# EAGLE board TinyDuino v1 (EAGLE 6.1)
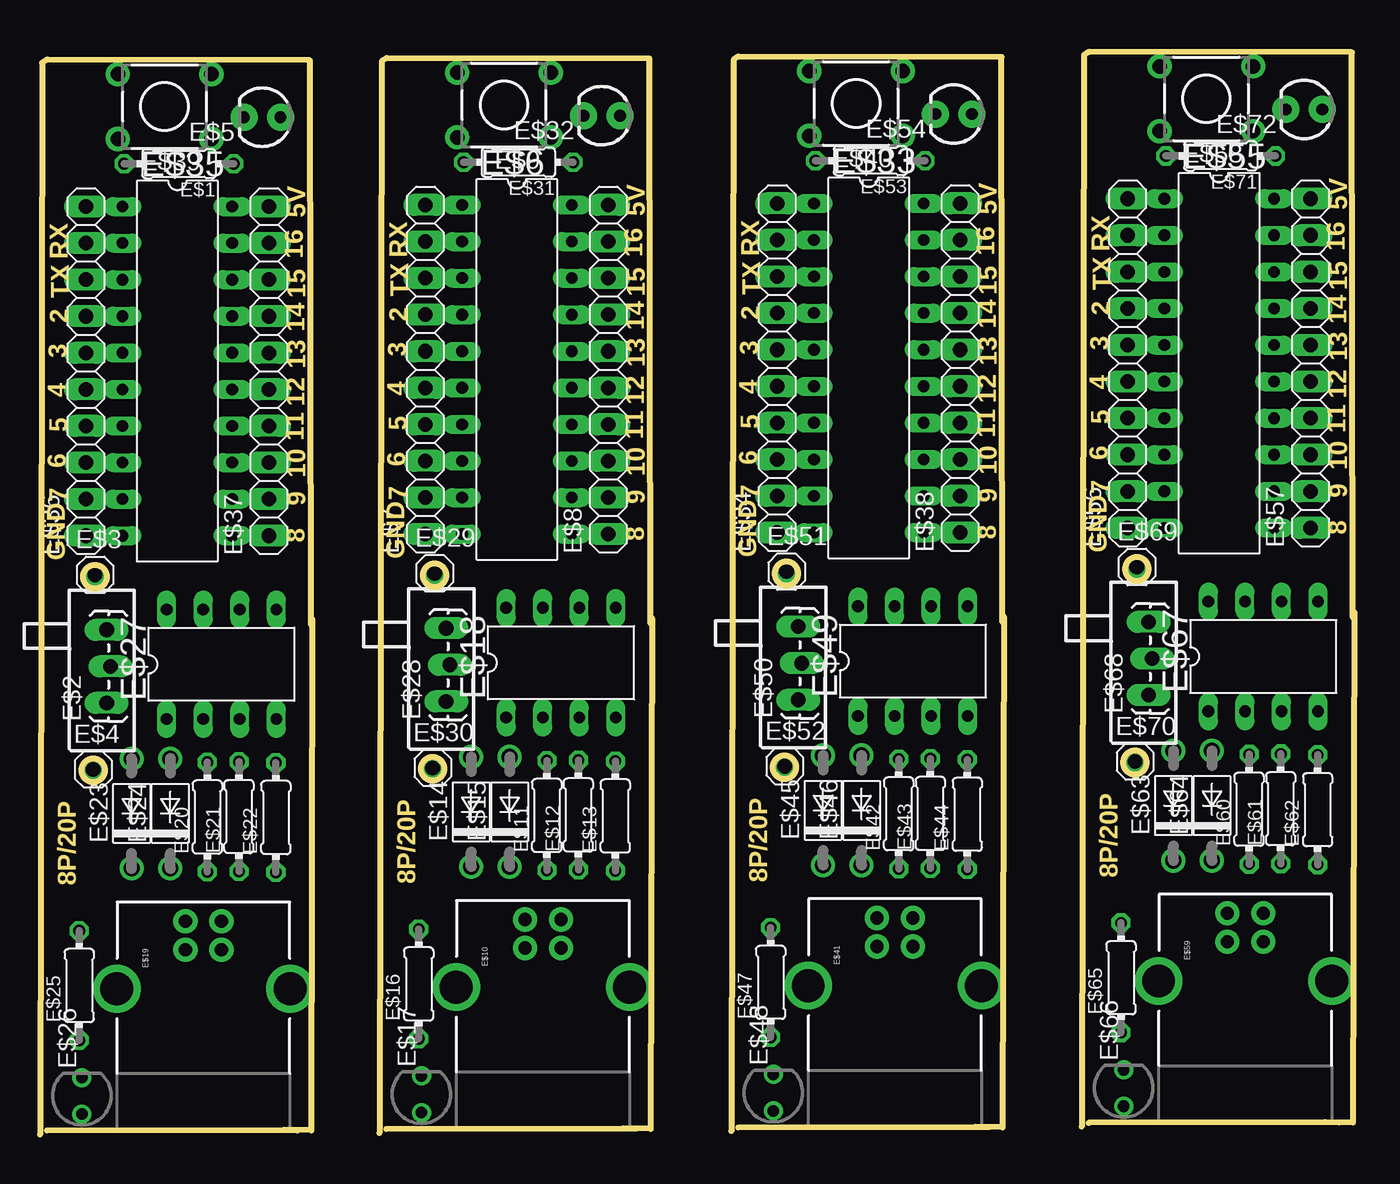
[diagram p0: board, top side]
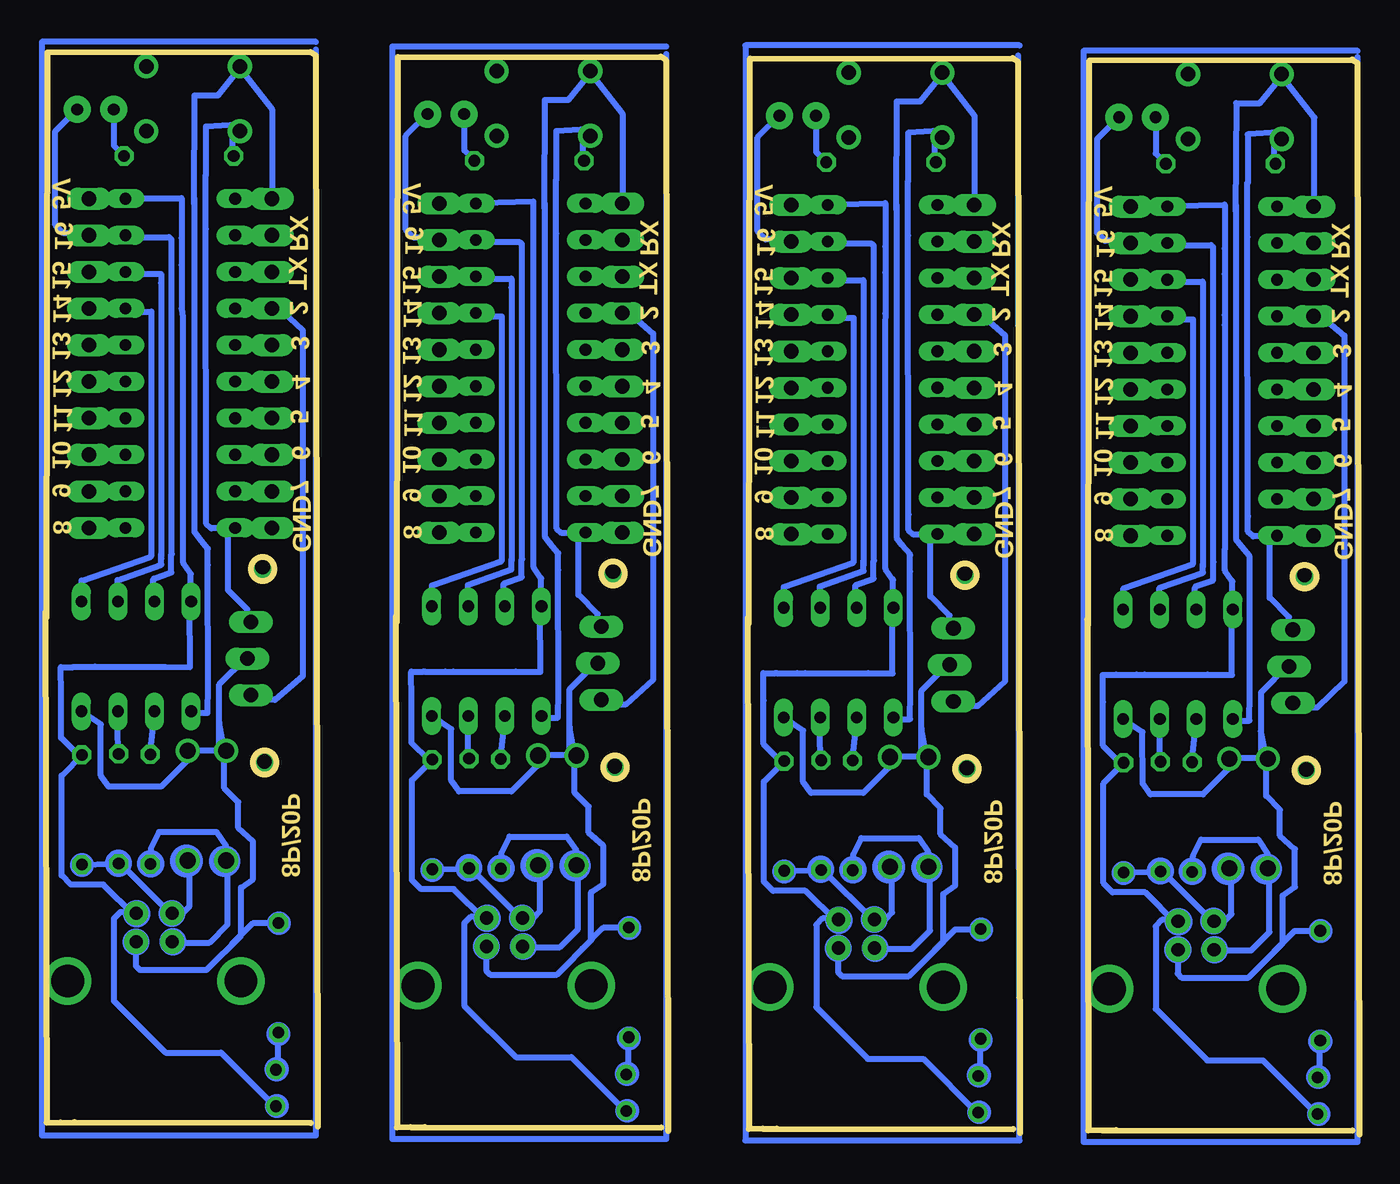
[diagram p1: board, bottom side, seen from below]

Size 91.29 x 75.18 mm. Coordinates in mm from the lower left corner, seen from the top.
Outline: 18.84,35.36 18.76,74.59 0.51,74.63
Outline: 17.89,0.29 0.47,0.25
Outline: 18.92,35.75 18.84,0.27 16.91,0.31
Outline: 0.5,74.64 0.15,74.41 0,0
Outline: 42.42,35.46 42.34,74.7 24.1,74.74
Outline: 41.47,0.39 24.05,0.36
Outline: 42.5,35.85 42.42,0.38 40.49,0.42
Outline: 24.08,74.75 23.73,74.51 23.58,0.11
Outline: 66.87,35.57 66.79,74.81 48.54,74.85
Outline: 65.92,0.5 48.5,0.47
Outline: 66.95,35.96 66.87,0.49 64.94,0.53
Outline: 48.53,74.85 48.18,74.62 48.03,0.22
Outline: 91.21,35.9 91.13,75.13 72.89,75.17
Outline: 90.26,0.83 72.84,0.79
Outline: 91.29,36.29 91.21,0.82 89.28,0.85
Outline: 72.87,75.18 72.52,74.95 72.37,0.54
Outline: circle at 3.83,38.73 radius 0.81
Outline: circle at 3.69,25.28 radius 0.81
Outline: circle at 27.41,38.84 radius 0.81
Outline: circle at 27.28,25.39 radius 0.81
Outline: circle at 51.86,38.94 radius 0.81
Outline: circle at 51.72,25.5 radius 0.81
Outline: circle at 76.2,39.27 radius 0.81
Outline: circle at 76.06,25.82 radius 0.81
Copper layers (1*16): Top 0.035mm / dielectric 1.5mm / Bottom 0.035mm
Design rules: minimum track width 10mil, minimum drill 24mil, track to track 8mil, track to pad 8mil, pad to pad 8mil, via to via 8mil, smd to smd 8mil, copper to edge 40mil, drill to drill 8mil, minimum pad ring 10mil, minimum via ring 8mil, stop-mask expansion 4mil, vias tented up to drill 0mil, thermal gap 10mil

## Footprints (pad centres in the part's own frame; a part is rotated, then mirrored left to right if it is on the bottom)
0204/7 = drill 0.813 octagon: 1 -3.81,0; 2 3.81,0
1X03_LOCK_LONGPADS = drill 1.016 long: 1 0,0; 2 2.54,-0.254; 3 5.08,0
1X01 = drill 1.016 octagon: 1 0,0
LED3MM = drill 0.813 pad 1.88: A -1.27,0; K 1.27,0
DIL20 = drill 0.813 long: 1 -11.43,-3.81; 2 -8.89,-3.81; 3 -6.35,-3.81; 4 -3.81,-3.81; 5 -1.27,-3.81; 6 1.27,-3.81; 7 3.81,-3.81; 8 6.35,-3.81; 9 8.89,-3.81; 10 11.43,-3.81; 11 11.43,3.81; 12 8.89,3.81; 13 6.35,3.81; 14 3.81,3.81; 15 1.27,3.81; 16 -1.27,3.81; 17 -3.81,3.81; 18 -6.35,3.81; 19 -8.89,3.81; 20 -11.43,3.81
1X10 = drill 1.016 long: 1 -11.43,0; 2 -8.89,0; 3 -6.35,0; 4 -3.81,0; 5 -1.27,0; 6 1.27,0; 7 3.81,0; 8 6.35,0; 9 8.89,0; 10 11.43,0
TL1105 = drill 1 pad 1.676: 1 -2.25,3.25; 2 2.25,3.25; 3 -2.25,-3.25; 4 2.25,-3.25
USB-B-PTH = drill 0.914 pad 1.676: D+ 0,1.25; D- 1.981,1.25; GND 0,-1.25; VBUS 1.981,-1.25 | drill 2.286: S1 -2.718,-6.02; S2 -2.718,6.02
DO41-7 = drill 1.118: A 3.81,0; C -3.81,0
LED3MM-NS = drill 0.813: A -1.27,0; K 1.27,0
DIL8 = drill 0.813 long: 1 -3.81,-3.81; 2 -1.27,-3.81; 3 1.27,-3.81; 4 3.81,-3.81; 5 3.81,3.81; 6 1.27,3.81; 7 -1.27,3.81; 8 -3.81,3.81

## Placement (x,y rotation side)
E$1  220R  [0204/7]  9.65,67.4 180 top
E$2  [1X03_LOCK_LONGPADS]  4.63,29.96 90 top
E$3  [1X01]  3.83,38.86 0 top
E$4  [1X01]  3.69,25.35 0 top
E$5  [LED3MM]  15.44,70.64 180 top
E$6  [DIL20]  33.13,53.11 270 top
E$7  [1X10]  26.78,53.11 90 top
E$8  [1X10]  39.48,53.11 90 top
E$9  [TL1105]  32.24,71.49 90 top
E$10  [USB-B-PTH]  34.94,12.94 90 top
E$11  68RD+  [0204/7]  35.21,22.15 90 top
E$12  68Rd-  [0204/7]  37.4,22.18 90 top
E$13  2K2  [0204/7]  39.97,22.11 90 top
E$14  [DO41-7]  29.95,22.39 90 top
E$15  [DO41-7]  32.63,22.39 90 top
E$16  2K2  [0204/7]  26.31,10.44 90 top
E$17  [LED3MM-NS]  26.5,2.79 90 top
E$18  [DIL8]  36.19,32.76 0 top
E$19  [USB-B-PTH]  11.35,12.83 90 top
E$20  68RD+  [0204/7]  11.63,22.04 90 top
E$21  68Rd-  [0204/7]  13.82,22.07 90 top
E$22  2K2  [0204/7]  16.39,22 90 top
E$23  [DO41-7]  6.37,22.29 90 top
E$24  [DO41-7]  9.05,22.29 90 top
E$25  2K2  [0204/7]  2.73,10.34 90 top
E$26  [LED3MM-NS]  2.91,2.68 90 top
E$27  [DIL8]  12.61,32.65 0 top
E$28  [1X03_LOCK_LONGPADS]  28.21,30.07 90 top
E$29  [1X01]  27.41,38.97 0 top
E$30  [1X01]  27.28,25.45 0 top
E$31  220R  [0204/7]  33.23,67.51 180 top
E$32  [LED3MM]  39.02,70.74 180 top
E$33  [DIL20]  57.58,53.22 270 top
E$34  [1X10]  51.23,53.22 90 top
E$35  [DIL20]  9.54,53.01 270 top
E$36  [1X10]  3.19,53.01 90 top
E$37  [1X10]  15.89,53.01 90 top
E$38  [1X10]  63.93,53.22 90 top
E$39  [TL1105]  8.65,71.38 90 top
E$40  [TL1105]  56.69,71.59 90 top
E$41  [USB-B-PTH]  59.39,13.05 90 top
E$42  68RD+  [0204/7]  59.66,22.25 90 top
E$43  68Rd-  [0204/7]  61.85,22.29 90 top
E$44  2K2  [0204/7]  64.42,22.22 90 top
E$45  [DO41-7]  54.4,22.5 90 top
E$46  [DO41-7]  57.08,22.5 90 top
E$47  2K2  [0204/7]  50.76,10.55 90 top
E$48  [LED3MM-NS]  50.94,2.89 90 top
E$49  [DIL8]  60.64,32.86 0 top
E$50  [1X03_LOCK_LONGPADS]  52.66,30.18 90 top
E$51  [1X01]  51.86,39.08 0 top
E$52  [1X01]  51.73,25.56 0 top
E$53  220R  [0204/7]  57.68,67.62 180 top
E$54  [LED3MM]  63.47,70.85 180 top
E$55  [DIL20]  81.92,53.55 270 top
E$56  [1X10]  75.57,53.55 90 top
E$57  [1X10]  88.27,53.55 90 top
E$58  [TL1105]  81.03,71.92 90 top
E$59  [USB-B-PTH]  83.73,13.37 90 top
E$60  68RD+  [0204/7]  84,22.58 90 top
E$61  68Rd-  [0204/7]  86.19,22.61 90 top
E$62  2K2  [0204/7]  88.76,22.54 90 top
E$63  [DO41-7]  78.74,22.83 90 top
E$64  [DO41-7]  81.42,22.83 90 top
E$65  2K2  [0204/7]  75.1,10.88 90 top
E$66  [LED3MM-NS]  75.28,3.22 90 top
E$67  [DIL8]  84.98,33.19 0 top
E$68  [1X03_LOCK_LONGPADS]  77,30.5 90 top
E$69  [1X01]  76.2,39.4 0 top
E$70  [1X01]  76.07,25.89 0 top
E$71  220R  [0204/7]  82.02,67.94 180 top
E$72  [LED3MM]  87.81,71.18 180 top

## Library data of the parts
E$1 E$11-E$13 E$16 E$20-E$22 E$25 E$31 E$42-E$44 E$47 E$53 E$60-E$62 E$65 E$71 = rcl
E$2 E$10 E$19 E$28 E$41 E$50 E$59 E$68 = SparkFun-Connectors
E$3 E$4 E$7 E$8 E$29 E$30 E$34 E$36-E$38 E$51 E$52 E$56 E$57 E$69 E$70 = pinhead
E$5 E$17 E$26 E$32 E$48 E$54 E$66 E$72 = SparkFun-LED
E$6 E$33 E$35 E$55 = atmel
E$9 E$39 E$40 E$58 = switch
E$14 E$15 E$23 E$24 E$45 E$46 E$63 E$64 = ref-packages-longpad
E$18 E$27 E$49 E$67 = on-semiconductor

## Nets
S$69: E$9.4
S$70: E$8.9
S$71: E$8.8
S$72: E$6.20
S$73: E$9.3
S$74: E$8.7
S$97: E$39.4
S$99: E$37.9
S$103: E$37.8
S$104: E$35.20
S$106: E$39.3
S$107: E$37.7
S$153: E$40.4
S$154: E$38.9
S$155: E$38.8
S$156: E$33.20
S$157: E$40.3
S$158: E$38.7
S$209: E$58.4
S$210: E$57.9
S$211: E$57.8
S$212: E$55.20
S$213: E$58.3
S$214: E$57.7

## Tracks (layer width: path | path; a pad name or v marks a point on that pad's centre or on a via)
S$1
  Bottom 0.406: 11.43,36.72 11.43,37.97 11.34,38.06
S$2
  Bottom 0.406: 5.83,41.6 6.25,41.51 5.85,41.51
S$3
  Bottom 0.406: 6.83,26.18 6.83,30.7 4.96,32.57
S$4
  Bottom 0.406: 4.9,35.05 4.9,35.92 6.23,37.25 6.23,41.14 6.03,41.34
S$5
  Bottom 0.406: 3.43,56.59 2.42,56.59 1.04,55.48 1.04,31.46 2.96,29.63 4.49,29.63 4.83,29.96
S$6
  Bottom 0.406: 16.54,25.78 16.62,25.78 17.82,26.99 17.82,30.03 17.84,31.91 16.99,31.91 15.48,31.94
S$7
  Bottom 0.406: 5.92,67.4 5.92,68.63 5.31,69.24
S$8
  Bottom 0.406: 15.83,62.05 17.67,62.05 18.22,62.61 18.22,69.13 16.61,70.75
S$9
  Bottom 0.406: 14.16,70.69 14.16,68.13 13.38,67.35
S$10
  Bottom 0.406: 37.04,56.77 36.27,56.71 35.14,56.7 35.17,39.7
S$11
  Bottom 0.406: 36.89,59.32 36.12,59.32 34.47,59.32 34.46,58.69 34.46,55.73 34.47,39.83 34.46,39.68
S$12
  Bottom 0.406: 36.92,61.87 36.15,61.87
S$13
  Bottom 0.406: 33.76,61.72 33.76,55.86 33.76,39.89 33.72,39.86
S$14
  Bottom 0.406: 36.93,64.59 36.62,64.59 32.95,64.68 32.95,61.64 32.95,59.86 32.95,57 32.95,56.3 32.95,40.72
S$15
  Bottom 0.406: 32.17,64.6 32.16,41.48
S$16
  Bottom 0.406: 31.33,43.05 31.33,41.96 30.97,41.64 29.44,41.64
S$17
  Bottom 0.406: 31.34,43.02 31.36,62.44
S$18
  Bottom 0.406: 32.18,64.23 32.12,71.63
S$19
  Bottom 0.406: 31.36,62.44 31.36,66.21
S$20
  Bottom 0.406: 32.15,71.73 30.5,71.73 28.82,73.8
S$21
  Bottom 0.406: 26.72,64.68 26.72,70.72 29.11,73.78
S$22
  Bottom 0.406: 29.14,69.69 31.35,69.56 31.35,66.16
S$23
  Bottom 0.406: 33.74,12.89 31.1,12.89 29.84,14.15 29.84,18.51 29.95,18.62
S$24
  Bottom 0.406: 33.74,14.91 32.98,14.91 32.48,15.41 32.48,18.39 32.63,18.55
S$25
  Bottom 0.406: 40.45,18.3 37.49,18.35 37.45,18.32 37.22,18.32 33.82,14.91
S$26
  Bottom 0.406: 35.16,18.51 35.16,19.42 34.6,20.58 30.62,20.58 29.95,19.58 29.95,18.77 30.03,18.7
S$27
  Bottom 0.406: 36.13,14.94
S$28
  Bottom 0.406: 36.22,12.87 36.22,11.27 35.94,10.99 31.3,10.99 28.92,13.38 28.92,16.71 28.07,17.29 28.07,19.92 29.1,20.85 29.1,22.64 30.07,23.61 30.07,26.09
S$29
  Bottom 0.406: 36.36,15 37.3,15 37.74,14.56 37.74,8.83 34.16,5.25 30.3,5.25 26.5,1.45
S$30
  Bottom 0.406: 26.33,4.15 26.33,6.35 26.66,6.68
S$31
  Bottom 0.406: 26.33,14.23 28.09,14.23 29.53,12.79
S$32
  Bottom 1.016: 26.3,1.43 26.3,1.56 26.38,1.64
S$33
  Bottom 1.016: 26.59,4.04 26.55,4.04 26.5,4.08
S$34
  Bottom 1.016: 26.27,6.62 26.29,6.62
S$35
  Bottom 1.016: 26.18,14.19 26.27,14.19 26.3,14.22
S$36
  Bottom 0.406: 30.16,26.22 32.61,26.22 32.72,26.11
S$37
  Bottom 0.406: 10.16,12.78 7.52,12.78 6.26,14.04 6.26,18.4 6.37,18.51
S$38
  Bottom 0.406: 10.16,14.8 9.39,14.8 8.9,15.3 8.9,18.28 9.05,18.44
S$39
  Bottom 0.406: 16.86,18.19 13.91,18.25 13.87,18.21 13.64,18.21 10.23,14.8
S$40
  Bottom 0.406: 11.57,18.4 11.57,19.32 11.02,20.47 7.04,20.47 6.37,19.47 6.37,18.67 6.45,18.59
S$41
  Bottom 0.406: 12.54,14.83
S$42
  Bottom 0.406: 12.64,12.76 12.64,11.16 12.36,10.88 7.72,10.88 5.33,13.27 5.33,16.6 4.49,17.18 4.49,19.81 5.52,20.74 5.52,22.54 6.48,23.5 6.48,25.98
S$43
  Bottom 0.406: 12.78,14.89 13.71,14.89 14.16,14.45 14.16,8.72 10.57,5.14 6.71,5.14 2.91,1.34
S$44
  Bottom 0.406: 2.75,4.04 2.75,6.24 3.08,6.57
S$45
  Bottom 0.406: 2.75,14.12 4.51,14.12 5.94,12.68
S$46
  Bottom 1.016: 2.72,1.32 2.72,1.46 2.8,1.53
S$47
  Bottom 1.016: 3.01,3.93 2.96,3.93 2.92,3.98
S$48
  Bottom 1.016: 2.69,6.51 2.7,6.51
S$49
  Bottom 1.016: 2.6,14.08 2.69,14.08 2.72,14.11
S$50
  Bottom 0.406: 12.76,14.63 12.76,14.68 14.89,16.81 17.15,16.81 17.79,17.44 17.79,24.38 16.29,25.87
S$51
  Bottom 0.406: 13.34,61.77 12.57,61.77
S$52
  Bottom 0.406: 6.58,26.11 9.03,26.11 9.14,26
S$53
  Bottom 0.406: 13.88,25.9 13.88,27.69 13.88,29.04 13.86,28.99 13.85,27.86
S$54
  Bottom 0.406: 11.64,25.71 11.64,25.87 11.36,28.38 11.36,28.93 11.34,28.72
S$55
  Bottom 0.406: 37.46,26.01 37.46,27.8 37.46,29.15 37.44,29.1 37.44,27.97
S$56
  Bottom 0.406: 35.22,25.82 35.22,25.98 34.95,28.49 34.95,29.03 34.92,28.83
S$57
  Bottom 0.406: 32.72,26.16 32.72,25.45 34.46,23.71 38.1,23.71 38.65,24.48 38.65,28.04 39.98,28.91
S$58
  Bottom 0.406: 40.49,32.03 38.51,32.03 34.15,32.03 32.44,32.02 32.46,36.42 32.59,36.7
S$59
  Bottom 0.406: 29.41,41.71 29.83,41.62 29.43,41.62
S$60
  Bottom 0.406: 30.08,26.18 30.07,26.26 30.42,28.17
S$61
  Bottom 0.406: 32.42,28.84 31.23,28.84 31.21,30.7 31.22,39.09 31.22,40.22
S$62
  Bottom 0.406: 31.21,40.25 31.77,40.92 32.16,41.44
S$63
  Bottom 0.406: 32.44,36.07 32.41,38.5 32.44,38.55 32.92,39.26 32.94,40.66
S$64
  Bottom 0.406: 34.97,38.16 33.75,38.59 33.75,39.85
S$65
  Bottom 0.406: 37.49,36.55 37.49,38.06 34.46,39.12 34.46,39.54 34.46,39.73
S$66
  Bottom 0.406: 39.98,37.45 39.98,38.02 35.2,39.69
S$67
  Bottom 0.406: 36.34,14.74 36.34,14.79 38.47,16.92 40.74,16.92 41.37,17.55 41.37,24.49 39.88,25.98
S$68
  Bottom 0.406: 36.41,61.87 33.91,61.87 33.76,61.72
S$75
  Bottom 0.406: 35.02,36.83 35.02,38.08 34.92,38.17
S$76
  Bottom 0.406: 13.46,56.66 12.69,56.6 11.56,56.59 11.58,39.59
S$77
  Bottom 0.406: 30.42,26.29 30.42,30.81 28.55,32.68
S$78
  Bottom 0.406: 28.48,35.15 28.48,36.03 29.82,37.36 29.82,41.24 29.62,41.44
S$79
  Bottom 0.406: 27.01,56.7 26.01,56.7 24.62,55.49 24.62,31.47 26.54,29.74 28.08,29.74 28.41,30.07
S$80
  Bottom 0.406: 40.12,25.89 40.2,25.89 41.4,27.1 41.4,30.14 41.42,32.02 40.57,32.02 39.07,32.05
S$81
  Bottom 0.406: 13.31,59.21 12.54,59.21 10.89,59.21 10.87,58.58 10.87,55.62 10.88,39.72 10.88,39.57
S$82
  Bottom 0.406: 10.17,61.61 10.17,55.76 10.17,39.78 10.14,39.75
S$83
  Bottom 0.406: 13.35,64.48 13.04,64.48 9.36,64.57 9.36,61.53 9.36,59.75 9.36,56.89 9.37,56.19 9.37,40.61
S$84
  Bottom 0.406: 8.59,64.49 8.58,41.37
S$85
  Bottom 0.406: 6.49,26.07 6.49,26.16 6.84,28.06
S$86
  Bottom 0.406: 8.83,28.73 7.65,28.73 7.63,30.59 7.64,38.98 7.63,40.11
S$87
  Bottom 0.406: 7.63,40.14 8.19,40.81 8.58,41.33
S$88
  Bottom 0.406: 8.86,35.96 8.82,38.39 8.86,38.45 9.34,39.15 9.36,40.56
S$89
  Bottom 0.406: 11.39,38.05 10.17,38.48 10.17,39.74
S$90
  Bottom 0.406: 13.9,36.44 13.9,37.95 10.87,39.02 10.87,39.43 10.87,39.63
S$91
  Bottom 0.406: 7.76,42.91 7.78,62.33
S$92
  Bottom 0.406: 8.59,64.12 8.54,71.52
S$93
  Bottom 0.406: 7.78,62.33 7.78,66.11
S$94
  Bottom 0.406: 8.56,71.62 6.92,71.62 5.24,73.69
S$95
  Bottom 0.406: 3.14,64.57 3.14,70.61 5.53,73.67
S$96
  Bottom 0.406: 5.56,69.58 7.77,69.45 7.77,66.05
S$98
  Bottom 0.406: 12.82,61.76 10.32,61.76 10.17,61.61
S$100
  Bottom 0.406: 9.14,26.06 9.14,25.35 10.88,23.61 14.52,23.61 15.06,24.37 15.07,27.93 16.4,28.81
S$101
  Bottom 0.406: 16.91,31.92 14.93,31.92 10.56,31.92 8.86,31.91 8.88,36.31 9,36.59
S$102
  Bottom 0.406: 16.4,37.34 16.4,37.91 11.62,39.58
S$105
  Bottom 0.406: 7.75,42.94 7.74,41.85 7.39,41.54 5.85,41.54
S$108
  Bottom 0.406: 29.5,67.51 29.5,68.74 28.89,69.35
S$109
  Bottom 0.406: 39.41,62.16 41.25,62.16 41.81,62.72 41.81,69.24 40.19,70.85
S$110
  Bottom 0.406: 37.74,70.8 37.74,68.23 36.96,67.46
S$111
  Bottom 0.406: 23.62,75.62 42.66,75.62 42.66,-0.42 23.62,-0.42 23.71,74.91
S$112
  Bottom 0.406: 61.49,56.88 60.72,56.82 59.59,56.81 59.62,39.81
S$113
  Bottom 0.406: 61.34,59.43 60.57,59.43 58.92,59.43 58.91,58.8 58.91,55.83 58.91,39.94 58.91,39.78
S$114
  Bottom 0.406: 61.37,61.98 60.6,61.98
S$115
  Bottom 0.406: 58.2,61.83 58.2,55.97 58.2,40 58.17,39.97
S$116
  Bottom 0.406: 61.38,64.69 61.07,64.69 57.4,64.79 57.4,61.75 57.4,59.97 57.4,57.1 57.4,56.41 57.4,40.83
S$117
  Bottom 0.406: 56.62,64.71 56.61,41.59
S$118
  Bottom 0.406: 55.78,43.16 55.77,42.07 55.42,41.75 53.89,41.75
S$119
  Bottom 0.406: 55.79,43.13 55.81,62.54
S$120
  Bottom 0.406: 56.63,64.33 56.57,71.74
S$121
  Bottom 0.406: 55.81,62.55 55.81,66.32
S$122
  Bottom 0.406: 56.59,71.84 54.95,71.84 53.27,73.91
S$123
  Bottom 0.406: 51.17,64.79 51.17,70.83 53.56,73.89
S$124
  Bottom 0.406: 53.59,69.8 55.8,69.67 55.8,66.27
S$125
  Bottom 0.406: 58.19,12.99 55.55,12.99 54.29,14.26 54.29,18.62 54.4,18.73
S$126
  Bottom 0.406: 58.19,15.02 57.42,15.02 56.93,15.52 56.93,18.5 57.08,18.65
S$127
  Bottom 0.406: 64.9,18.41 61.94,18.46 61.9,18.42 61.67,18.42 58.27,15.02
S$128
  Bottom 0.406: 59.61,18.62 59.61,19.53 59.05,20.68 55.07,20.68 54.4,19.69 54.4,18.88 54.48,18.81
S$129
  Bottom 0.406: 60.58,15.04
S$130
  Bottom 0.406: 60.67,12.98 60.67,11.37 60.39,11.1 55.75,11.1 53.37,13.48 53.37,16.82 52.52,17.4 52.52,20.03 53.55,20.96 53.55,22.75 54.52,23.72 54.52,26.19
S$131
  Bottom 0.406: 60.81,15.1 61.75,15.1 62.19,14.66 62.19,8.94 58.61,5.36 54.75,5.36 50.95,1.55
S$132
  Bottom 0.406: 50.78,4.25 50.78,6.46 51.11,6.79
S$133
  Bottom 0.406: 50.78,14.33 52.54,14.33 53.98,12.9
S$134
  Bottom 1.016: 50.75,1.53 50.75,1.67 50.83,1.75
S$135
  Bottom 1.016: 51.04,4.15 51,4.15 50.95,4.19
S$136
  Bottom 1.016: 50.72,6.73 50.74,6.73
S$137
  Bottom 1.016: 50.63,14.3 50.72,14.3 50.75,14.33
S$138
  Bottom 0.406: 54.61,26.33 57.06,26.33 57.17,26.22
S$139
  Bottom 0.406: 61.91,26.11 61.91,27.91 61.91,29.26 61.89,29.21 61.89,28.08
S$140
  Bottom 0.406: 59.67,25.93 59.67,26.09 59.4,28.6 59.4,29.14 59.37,28.94
S$141
  Bottom 0.406: 57.17,26.27 57.17,25.56 58.91,23.82 62.55,23.82 63.1,24.58 63.1,28.14 64.43,29.02
S$142
  Bottom 0.406: 64.94,32.14 62.96,32.14 58.6,32.14 56.89,32.12 56.91,36.53 57.04,36.81
S$143
  Bottom 0.406: 53.86,41.82 54.28,41.73 53.88,41.73
S$144
  Bottom 0.406: 54.52,26.29 54.52,26.37 54.87,28.28
S$145
  Bottom 0.406: 56.87,28.95 55.68,28.95 55.66,30.81 55.67,39.2 55.66,40.32
S$146
  Bottom 0.406: 55.66,40.36 56.22,41.03 56.61,41.55
S$147
  Bottom 0.406: 56.89,36.18 56.86,38.61 56.89,38.66 57.37,39.37 57.39,40.77
S$148
  Bottom 0.406: 59.42,38.26 58.2,38.7 58.2,39.95
S$149
  Bottom 0.406: 61.93,36.66 61.93,38.17 58.91,39.23 58.91,39.65 58.9,39.84
S$150
  Bottom 0.406: 64.43,37.56 64.43,38.13 59.65,39.8
S$151
  Bottom 0.406: 60.79,14.85 60.79,14.89 62.92,17.02 65.19,17.02 65.82,17.66 65.82,24.6 64.33,26.09
S$152
  Bottom 0.406: 60.86,61.98 58.36,61.98 58.2,61.83
S$159
  Bottom 0.406: 59.47,36.94 59.47,38.18 59.37,38.28
S$160
  Bottom 0.406: 54.87,26.4 54.87,30.92 53,32.79
S$161
  Bottom 0.406: 52.93,35.26 52.93,36.13 54.27,37.47 54.27,41.35 54.06,41.55
S$162
  Bottom 0.406: 51.46,56.81 50.46,56.81 49.07,55.6 49.07,31.58 50.99,29.84 52.53,29.84 52.86,30.18
S$163
  Bottom 0.406: 64.57,26 64.65,26 65.85,27.2 65.85,30.25 65.87,32.13 65.02,32.13 63.52,32.15
S$164
  Bottom 0.406: 53.95,67.62 53.95,68.85 53.34,69.46
S$165
  Bottom 0.406: 63.86,62.27 65.7,62.27 66.25,62.83 66.25,69.35 64.64,70.96
S$166
  Bottom 0.406: 62.19,70.91 62.19,68.34 61.41,67.56
S$167
  Bottom 0.406: 48.16,75.55 67.2,75.55 67.2,-0.31 48.16,-0.31 48.16,75.02
S$168
  Bottom 0.406: 85.83,57.2 85.06,57.14 83.93,57.13 83.96,40.13
S$169
  Bottom 0.406: 85.68,59.76 84.91,59.76 83.26,59.75 83.25,59.12 83.25,56.16 83.25,40.26 83.25,40.11
S$170
  Bottom 0.406: 85.71,62.31 84.94,62.31
S$171
  Bottom 0.406: 82.55,62.15 82.55,56.3 82.55,40.33 82.51,40.29
S$172
  Bottom 0.406: 85.72,65.02 85.41,65.02 81.83,65.02 81.83,62.26 81.83,60.38 81.83,57.34 81.74,56.73 81.74,41.15
S$173
  Bottom 0.406: 80.96,65.03 80.95,41.91
S$174
  Bottom 0.406: 80.12,43.48 80.12,42.39 79.76,42.08 78.23,42.08
S$175
  Bottom 0.406: 80.13,43.46 80.15,62.87
S$176
  Bottom 0.406: 80.97,64.66 80.91,72.06
S$177
  Bottom 0.406: 80.15,62.87 80.15,66.65
S$178
  Bottom 0.406: 80.93,72.16 79.29,72.16 77.61,74.24
S$179
  Bottom 0.406: 75.51,65.12 75.51,71.15 77.9,74.21
S$180
  Bottom 0.406: 77.93,70.12 80.14,69.99 80.14,66.59
S$181
  Bottom 0.406: 82.53,13.32 79.89,13.32 78.63,14.58 78.63,18.94 78.74,19.06
S$182
  Bottom 0.406: 82.53,15.35 81.77,15.35 81.27,15.84 81.27,18.83 81.42,18.98
S$183
  Bottom 0.406: 89.24,18.73 86.28,18.79 86.24,18.75 86.01,18.75 82.61,15.35
S$184
  Bottom 0.406: 83.95,18.94 83.95,19.86 83.39,21.01 79.41,21.01 78.74,20.01 78.74,19.21 78.82,19.13
S$185
  Bottom 0.406: 84.92,15.37
S$186
  Bottom 0.406: 85.01,13.3 85.01,11.7 84.73,11.42 80.09,11.42 77.71,13.81 77.71,17.14 76.86,17.72 76.86,20.35 77.89,21.28 77.89,23.08 78.86,24.04 78.86,26.52
S$187
  Bottom 0.406: 85.15,15.43 86.09,15.43 86.53,14.99 86.53,9.26 82.95,5.68 79.09,5.68 75.29,1.88
S$188
  Bottom 0.406: 75.12,4.58 75.12,6.78 75.45,7.11
S$189
  Bottom 0.406: 75.12,14.66 76.88,14.66 78.32,13.23
S$190
  Bottom 1.016: 75.09,1.86 75.09,2 75.17,2.07
S$191
  Bottom 1.016: 75.38,4.47 75.34,4.47 75.29,4.52
S$192
  Bottom 1.016: 75.06,7.05 75.08,7.05
S$193
  Bottom 1.016: 74.97,14.63 75.06,14.63 75.09,14.66
S$194
  Bottom 0.406: 78.95,26.65 81.4,26.65 81.51,26.54
S$195
  Bottom 0.406: 86.25,26.44 86.25,28.24 86.25,29.58 86.23,29.53 86.23,28.4
S$196
  Bottom 0.406: 84.01,26.25 84.01,26.42 83.74,28.92 83.74,29.47 83.71,29.26
S$197
  Bottom 0.406: 81.51,26.6 81.51,25.89 83.25,24.15 86.89,24.15 87.44,24.91 87.44,28.47 88.77,29.35
S$198
  Bottom 0.406: 89.28,32.47 87.3,32.46 82.94,32.46 81.23,32.45 81.25,36.86 81.38,37.13
S$199
  Bottom 0.406: 78.2,42.14 78.62,42.05 78.22,42.05
S$200
  Bottom 0.406: 78.86,26.61 78.86,26.7 79.21,28.61
S$201
  Bottom 0.406: 81.21,29.27 80.02,29.27 80,31.13 80.01,39.52 80.01,40.65
S$202
  Bottom 0.406: 80,40.68 80.56,41.35 80.95,41.87
S$203
  Bottom 0.406: 81.23,36.5 81.2,38.93 81.23,38.99 81.71,39.69 81.73,41.1
S$204
  Bottom 0.406: 83.76,38.59 82.54,39.02 82.54,40.28
S$205
  Bottom 0.406: 86.28,36.98 86.28,38.49 83.25,39.56 83.25,39.98 83.25,40.17
S$206
  Bottom 0.406: 88.77,37.88 88.77,38.46 83.99,40.12
S$207
  Bottom 0.406: 85.13,15.17 85.13,15.22 87.26,17.35 89.53,17.35 90.16,17.98 90.16,24.92 88.67,26.42
S$208
  Bottom 0.406: 85.2,62.3 82.7,62.3 82.55,62.15
S$215
  Bottom 0.406: 83.81,37.27 83.81,38.51 83.71,38.6
S$216
  Bottom 0.406: 79.21,26.73 79.21,31.24 77.34,33.11
S$217
  Bottom 0.406: 77.27,35.59 77.27,36.46 78.61,37.8 78.61,41.68 78.41,41.88
S$218
  Bottom 0.406: 75.8,57.13 74.8,57.13 73.41,55.84 73.41,31.82 75.33,30.17 76.87,30.17 77.2,30.5
S$219
  Bottom 0.406: 88.91,26.33 88.99,26.33 90.19,27.53 90.19,30.57 90.21,32.46 89.36,32.46 87.86,32.48
S$220
  Bottom 0.406: 78.29,67.94 78.29,69.17 77.68,69.78
S$221
  Bottom 0.406: 0.13,75.24 19.17,75.24 19.17,-0.53 0.13,-0.53 0.13,74.81
S$222
  Bottom 0.406: 88.2,62.59 90.04,62.59 90.6,63.15 90.6,69.67 88.98,71.29
S$223
  Bottom 0.406: 86.53,71.23 86.53,68.67 85.75,67.89
S$224
  Bottom 0.406: 72.5,75.87 91.54,75.87 91.54,-0.07 72.5,-0.07 72.5,75.35
(copper drawn outside any net)
  shapes: Bottom circle x52

## Text on the board
Dimension: 5V | 5V | 5V | 5V | 16 | RX | 16 | RX | 16 | RX | 16 | RX | TX | 15 | TX | 15 | TX | 15 | TX | 15 | 2 | 2 | 2 | 2 | 14 | 14 | 14 | 14 | 3 | 3 | 3 | 3 | 13 | 13 | 13 | 13 | 4 | 4 | 4 | 12 | 4 | 12 | 12 | 12 | 5 | 5 | 5 | 11 | 5 | 11 | 11 | 11 | 6 | 6 | 6 | 6 | 10 | 10 | 10 | 10 | 7 | 7 | 9 | 7 | 9 | 7 | 9 | 9 | 8 | 8 | 8 | 8 | GND | GND | GND | GND | 8P/20P | 8P/20P | 8P/20P | 8P/20P